# EAGLE board odrive_ext_1 (EAGLE 9.6.2)
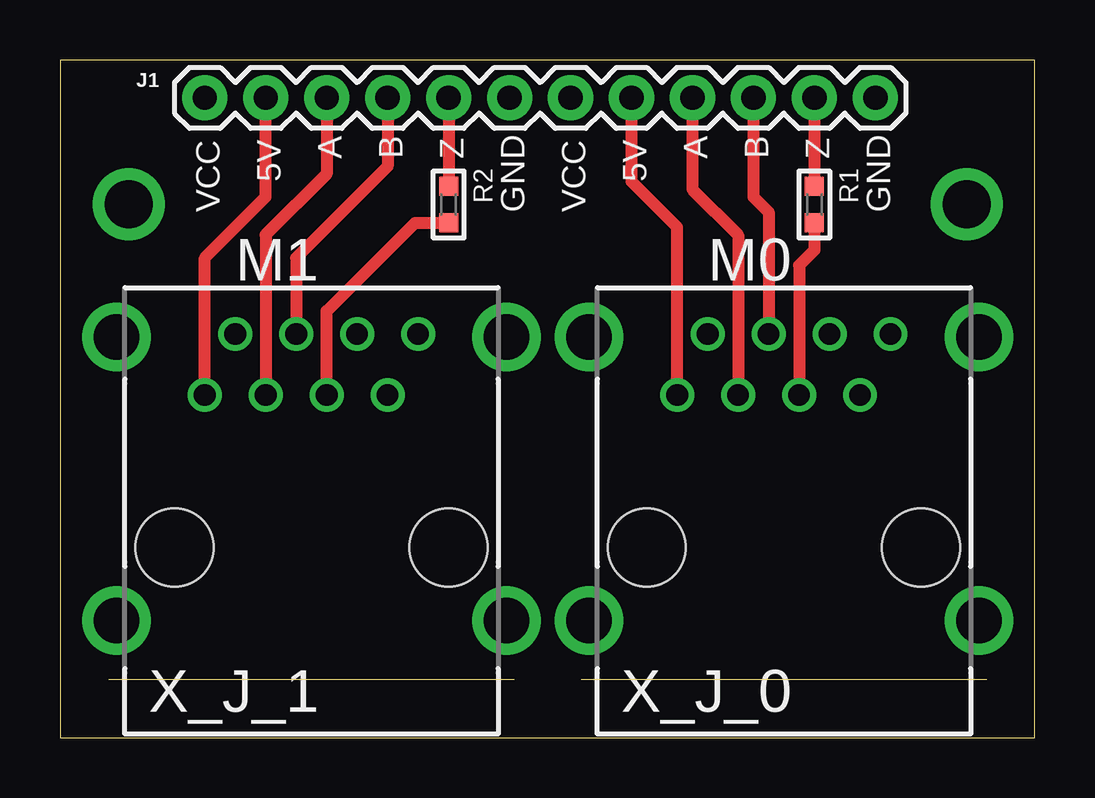
[diagram p0: board, top side]
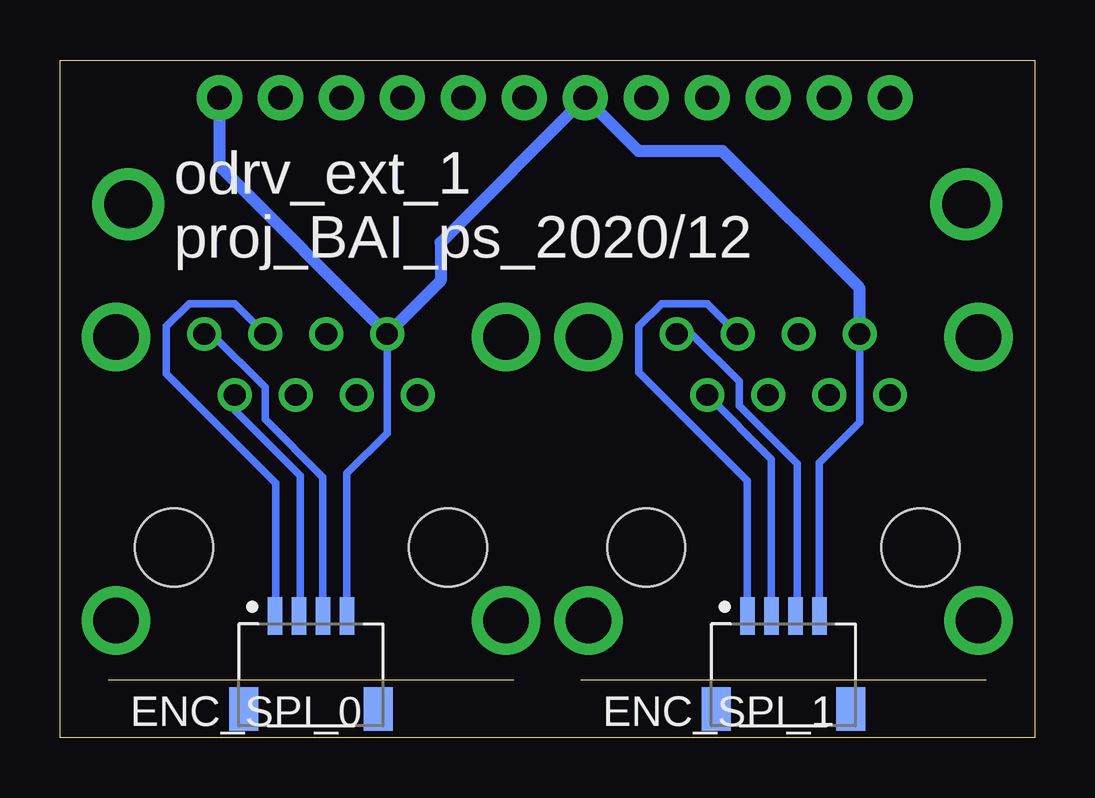
[diagram p1: board, bottom side, seen from below]

Size 40.62 x 28.25 mm. Coordinates in mm from the lower left corner, seen from the top.
Outline: 0,0 40.62,0 40.62,28.25 0,28.25 0,0
Copper layers (1*16): Top 0.035mm / dielectric 1.5mm / Bottom 0.035mm
Design rules "default *": minimum track width 6mil, minimum drill 0.35mm, track to track 6mil, track to pad 6mil, pad to pad 6mil, via to via 6mil, smd to smd 6mil, copper to edge 6mil, drill to drill 6mil, minimum pad ring 10mil, minimum via ring 8mil, stop-mask expansion 4mil, vias tented up to drill 20mil, thermal gap 10mil

## Footprints (pad centres in the part's own frame; a part is rotated, then mirrored left to right if it is on the bottom)
JST_SM04B-SRSS-TB(LF)(SN) = smd 0.6 x 1.55: 1 -1.5,0; 2 -0.5,0; 3 0.5,0; 4 1.5,0 | smd 1.2 x 1.8: S1 -2.8,-3.875; S2 2.8,-3.875
1X12 = drill 1.016 pad 1.88: 1 0,0; 2 2.54,0; 3 5.08,0; 4 7.62,0; 5 10.16,0; 6 12.7,0; 7 15.24,0; 8 17.78,0; 9 20.32,0; 10 22.86,0; 11 25.4,0; 12 27.94,0
R0603 = smd 0.8 x 0.8: 1 -0.762,0; 2 0.762,0
RJ45-SHIELD1 = drill 0.9 pad 1.4: 1 -4.445,6.35; 2 -3.175,8.89; 3 -1.905,6.35; 4 -0.635,8.89; 5 0.635,6.35; 6 1.905,8.89; 7 3.175,6.35; 8 4.445,8.89 | drill 1.9 pad 2.5: S1 -8.128,-3.048; S2 8.128,-3.048; S3 -8.128,8.76; S4 8.128,8.76 | hole 3.251: -5.715,0; 5.715,0

## Placement (x,y rotation side)
ENC_SPI_0  SM04B-SRSS-TB(LF)(SN)  [JST_SM04B-SRSS-TB(LF)(SN)]  30.16,5.08 0 bottom
ENC_SPI_1  SM04B-SRSS-TB(LF)(SN)  [JST_SM04B-SRSS-TB(LF)(SN)]  10.48,5.08 0 bottom
J1  [1X12]  6.03,26.67 0 top
R1  0  [R0603]  31.43,22.23 270 top
R2  0  [R0603]  16.19,22.23 270 top
X_J_0  RJ45-6L21-B  [RJ45-SHIELD1]  30.16,7.94 0 top
X_J_1  RJ45-6L21-B  [RJ45-SHIELD1]  10.48,7.94 0 top

## Library data of the parts
ENC_SPI_0 ENC_SPI_1 = SM04B-SRSS-TB_LF__SN_; ARROW_EUROPE-PURCHASE-URL: https://snapeda.com/shop?store=Arrow+Europe&id=557466; AVAILABILITY: Good; DESCRIPTION: Connector Header Surface Mount, Right Angle 4 position 0.039 (1.00mm); DIGIKEY-PURCHASE-URL: https://snapeda.com/shop?store=DigiKey&id=557466; MF: JST Sales; MP: SM04B-SRSS-TB(LF)(SN); PACKAGE: None; PRICE: None
J1 = SparkFun-Connectors
R1 R2 = rc-master-smd
X_J_0 X_J_1 = con-tycoelectronics; OC_FARNELL: unknown; OC_NEWARK: unknown

## Nets
5V_0: J1.8 X_J_0.1
5V_1: J1.2 X_J_1.1
CSQ_0: ENC_SPI_0.1 X_J_0.6
CSQ_1: ENC_SPI_1.1 X_J_1.6
DATA_0: ENC_SPI_0.3 X_J_0.8
DATA_1: ENC_SPI_1.3 X_J_1.8
GND: ENC_SPI_0.4 ENC_SPI_1.4 J1.6 J1.12 X_J_0.2 X_J_1.2
H_0: J1.11 R1.1
H_1: J1.5 R2.1
HOME_S_0: R1.2 X_J_0.5
HOME_S_1: R2.2 X_J_1.5
IFA_0: J1.9 X_J_0.3
IFA_1: J1.3 X_J_1.3
IFB_0: J1.10 X_J_0.4
IFB_1: J1.4 X_J_1.4
SCK_0: ENC_SPI_0.2 X_J_0.7
SCK_1: ENC_SPI_1.2 X_J_1.7
V_3V3_0: J1.7
V_3V3_1: J1.1

## Tracks (layer width: path | path; a pad name or v marks a point on that pad's centre or on a via)
5V_0
  Top 0.508: X_J_0.1 25.72,21.27 23.81,23.18 J1.8
5V_1
  Top 0.508: X_J_1.1 6.03,20 8.57,22.54 J1.2
CSQ_0
  Bottom 0.305: X_J_0.6 33.34,18.1 35.24,18.1 36.2,17.14 36.2,15.18 31.62,10.6 31.62,5.12 ENC_SPI_0.1
CSQ_1
  Bottom 0.305: X_J_1.6 13.65,18.1 15.56,18.1 16.51,17.14 16.51,15.24 11.98,10.71 ENC_SPI_1.1
DATA_0
  Bottom 0.305: X_J_0.8 34.29,16.83 32.07,14.61 32.07,13.27 29.66,10.87 ENC_SPI_0.3
DATA_1
  Bottom 0.305: X_J_1.8 14.29,16.83 12.32,14.86 12.32,13.84 9.91,11.43 9.91,5.15 ENC_SPI_1.3
GND
  Bottom 0.305: X_J_1.2 7.3,13.14 8.98,11.47 ENC_SPI_1.4 | X_J_0.2 26.99,12.7 28.66,11.03 ENC_SPI_0.4
  Bottom 0.508: X_J_1.2 7.3,18.73 13.02,24.45 16.51,24.45 J1.6 24.77,20.64 24.77,19.05 X_J_0.2 33.97,23.81 J1.12
H_0
  Top 0.508: J1.11 R1.1
H_1
  Top 0.508: J1.5 R2.1
HOME_S_0
  Top 0.508: R1.2 31.43,20.32 30.8,19.68 X_J_0.5
HOME_S_1
  Top 0.508: X_J_1.5 11.11,17.78 14.8,21.46 R2.2
IFA_0
  Top 0.508: J1.9 26.35,22.86 28.26,20.95 X_J_0.3
IFA_1
  Top 0.508: J1.3 11.11,23.5 8.57,20.95 X_J_1.3
IFB_0
  Top 0.508: J1.10 28.89,22.54 29.53,21.91 X_J_0.4
IFB_1
  Top 0.508: J1.4 13.65,23.81 9.84,20 X_J_1.4
N$1  (via drill 2)
  other vias: 2.86,22.23
N$2  (via drill 2)
  other vias: 37.78,22.23
SCK_0
  Bottom 0.305: X_J_0.7 33.34,13.65 30.61,10.92 30.61,5.14 ENC_SPI_0.2
SCK_1
  Bottom 0.305: X_J_1.7 10.98,11.61 ENC_SPI_1.2

## Text on the board
tPlace: A | B | Z | A | B | Z | 5V | 5V | VCC | GND | VCC | GND | M1 | M0
bPlace: odrv_ext_1 / proj_BAI_ps_2020/12